# Allegro board 2019-08-16-ss.brd
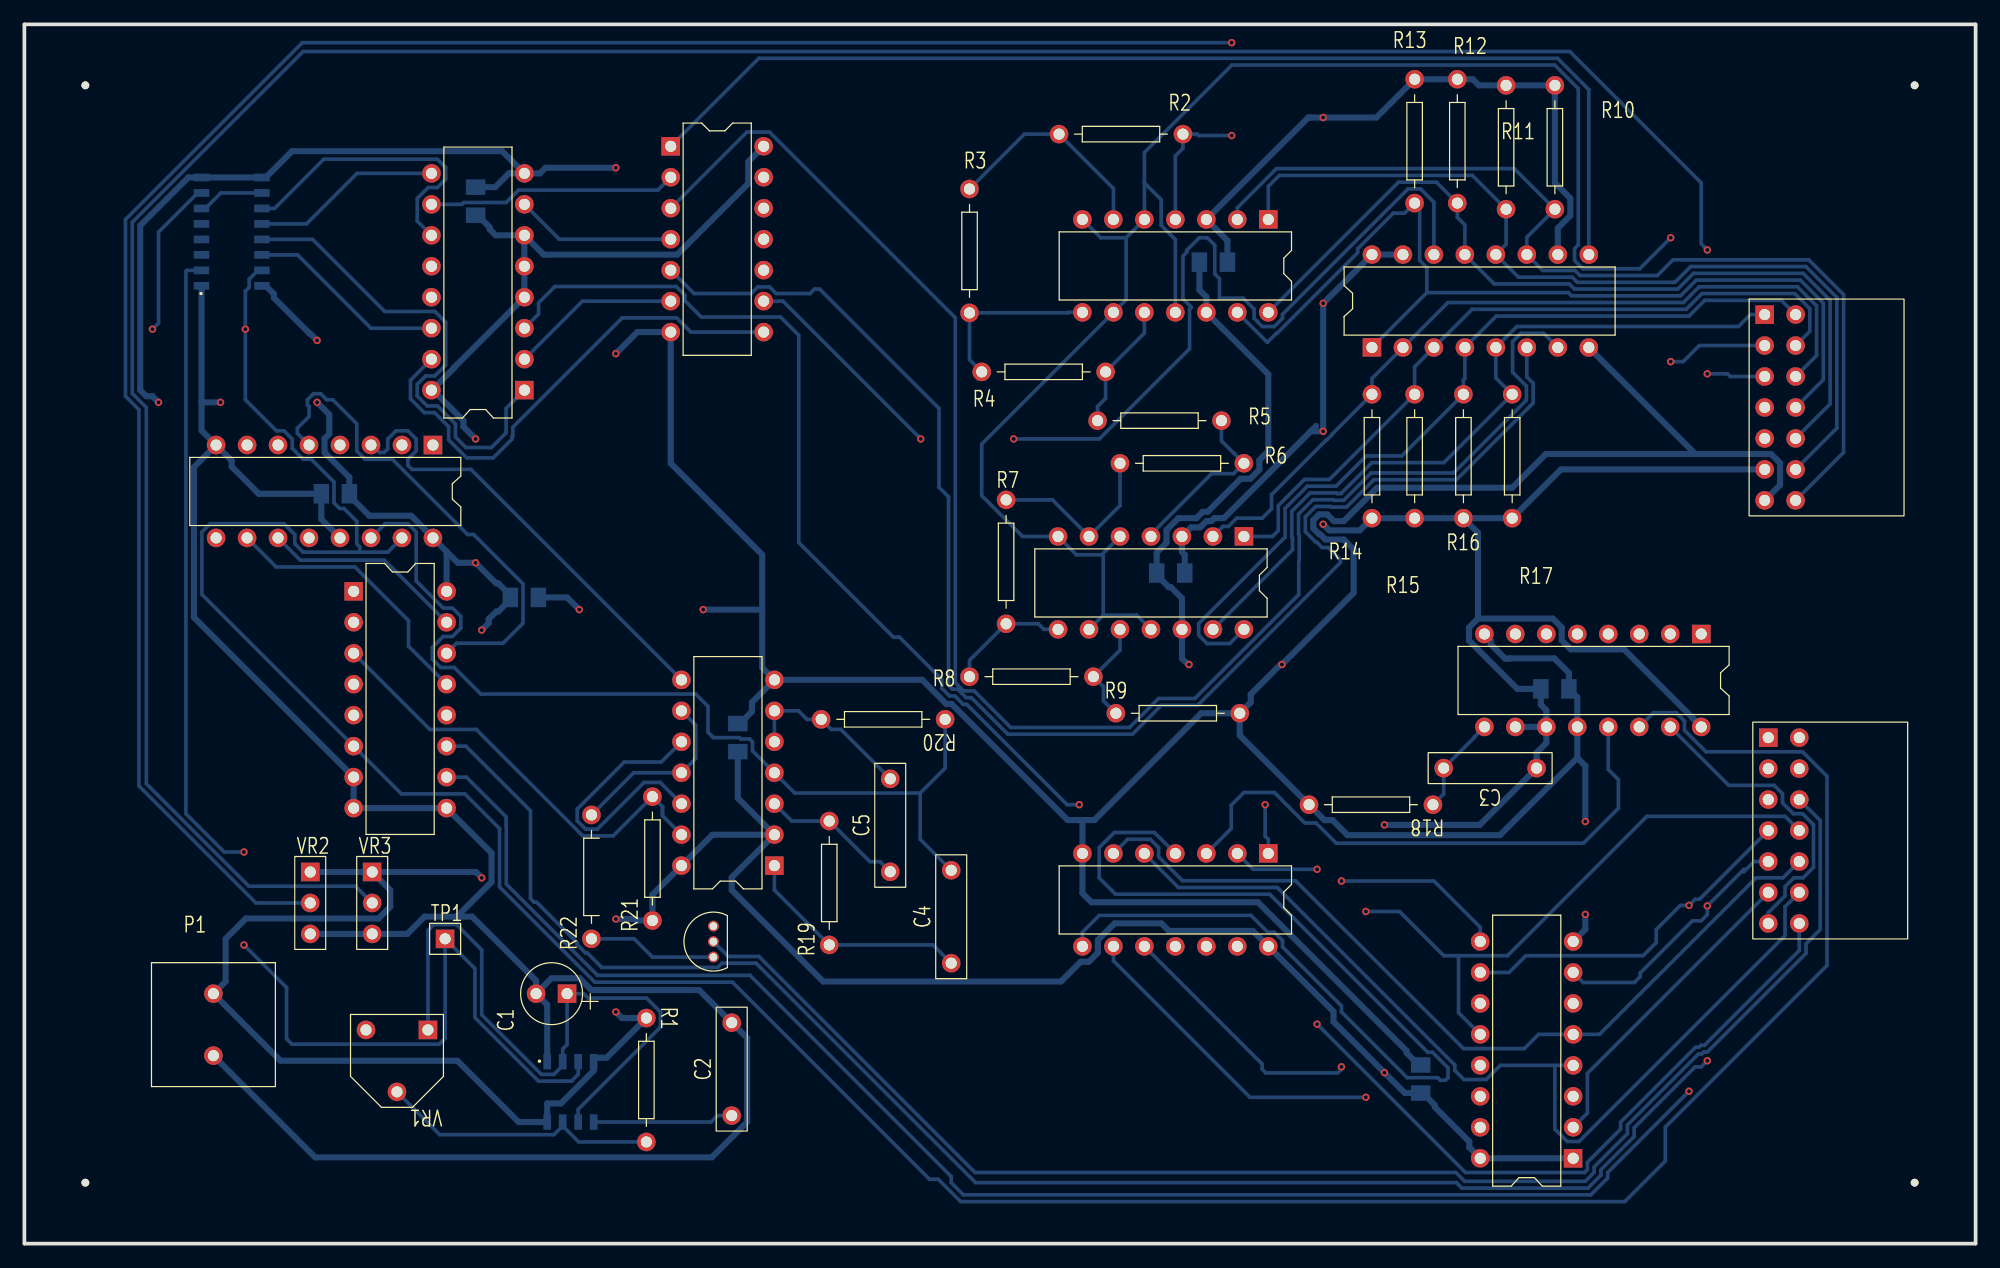
[diagram p0: board, top side]
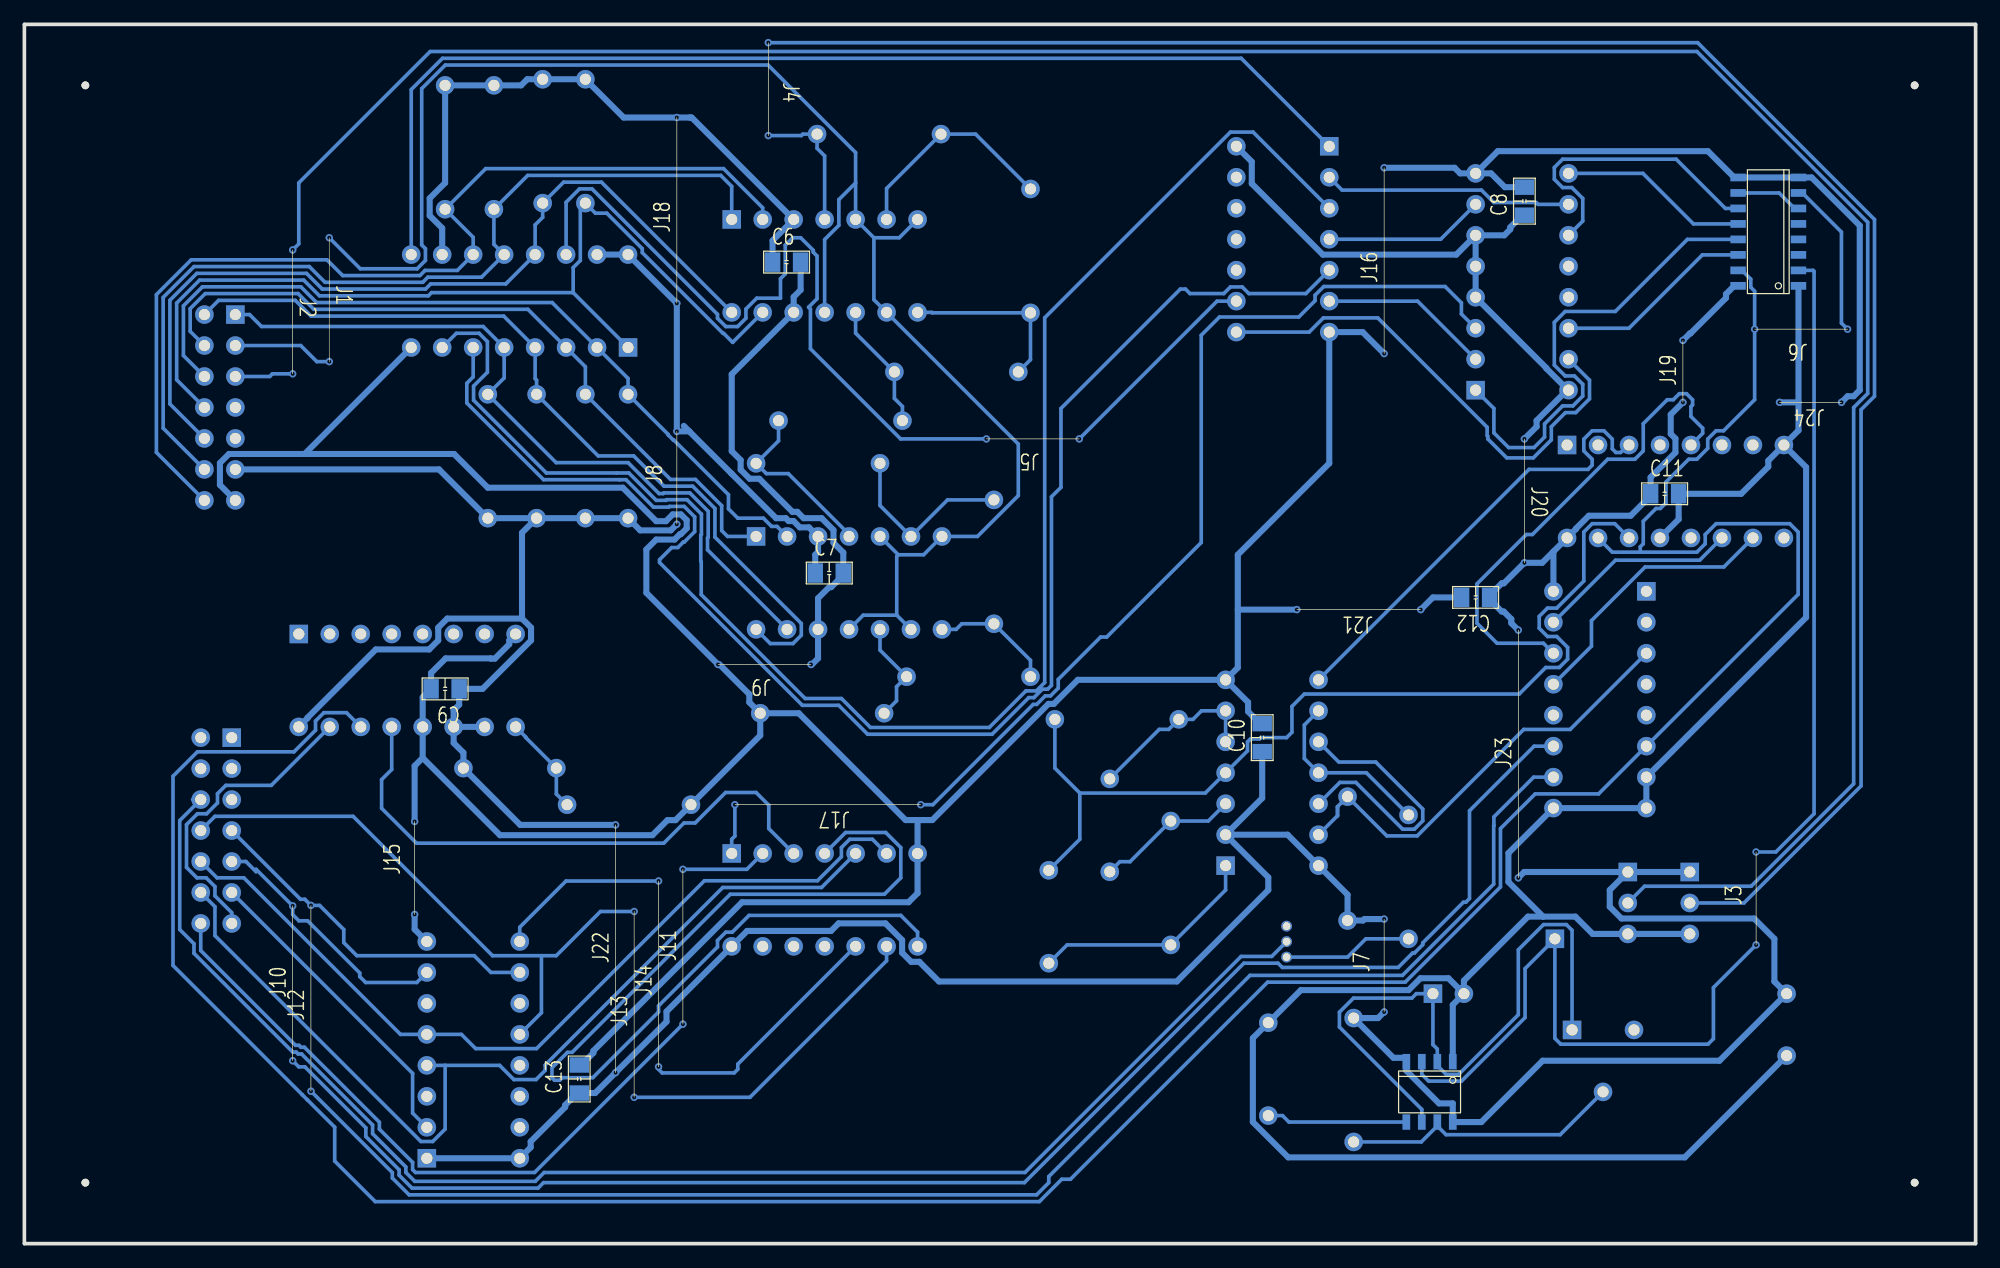
[diagram p1: board, bottom side, seen from below]

Outline 160 x 100 mm; copper layers: TOP, BOTTOM. Coordinates in mm from the lower left corner of the outline.
Outline path: 0,100 0,0 160,0 160,100 0,100

## Design rules (mm)
nets with their own width: min track width 0.5; nets +5V GND

## Placement (name value [footprint] x y rotation side)
C1  10uF  [CAP196]  44.5 20.5 90 top
C2  0.1uF  [CAP300]  58 10.5 90 top
C3  0.1uF  [CAP300]  124 39 180 top
C4  0.1uF  [CAP300]  76 23 90 top
C5  0.1uF  [CAP300]  71 30.5 90 top
C6  0.1uF  [SMDCAP]  98.5 80.5 180 bottom
C7  0.1uF  [SMDCAP]  95 55 180 bottom
C8  0.1uF  [SMDCAP]  37 84.5 90 bottom
C9  0.1uF  [SMDCAP]  124.5 45.5 0 bottom
C10  0.1uF  [SMDCAP]  58.5 40.5 90 bottom
C11  0.1uF  [SMDCAP]  26.5 61.5 180 bottom
C12  0.1uF  [SMDCAP]  40 53 0 bottom
C13  0.1uF  [SMDCAP]  114.5 12.5 90 bottom
J1  -  [J3]  135 82.5 270 bottom
J2  -  [J3]  138 81.5 270 bottom
J3  -  [J2]  18 24.5 90 bottom
J4  -  [J2]  99 98.5 270 bottom
J5  -  [J2]  73.5 66 0 bottom
J6  -  [J2]  10.5 75 0 bottom
J7  -  [J2]  48.5 19 90 bottom
J8  -  [J2]  106.5 59 90 bottom
J9  -  [J2]  95.5 47.5 0 bottom
J10  -  [J4]  138 15 90 bottom
J11  -  [J4]  106 18 90 bottom
J12  -  [J5]  136.5 12.5 90 bottom
J13  -  [J5]  110 12 90 bottom
J14  -  [J5]  108 14.5 90 bottom
J15  -  [J2]  128 27 90 bottom
J16  -  [J5]  48.5 73 90 bottom
J17  -  [J5]  86.5 36 0 bottom
J18  -  [J5]  106.5 77.12 90 bottom
J19  -  [J1]  24 69 90 bottom
J20  -  [J3]  37 66 270 bottom
J21  -  [J3]  45.5 52 0 bottom
J22  -  [J8]  111.52 14.02 90 bottom
J23  -  [J8]  37.5 30 90 bottom
J24  -  [J1]  11 69 0 bottom
NOREF  -  [unnamed]  155 5 0 top
NOREF#2  -  [unnamed]  5 95 0 top
NOREF#3  -  [unnamed]  155 95 0 top
NOREF#4  -  [unnamed]  5 5 0 top
P1  CON2  [2P]  15.5 20.5 0 top
P2  CON14  [JUMPER14]  142.7 76.2 270 top
P3  CON14  [JUMPER14]  143 41.5 270 top
Q1  2SC1815  [TO92]  56.5 23.5 180 top
R1  10K  [RES400]  51 18.5 270 top
R2  10K  [RES400]  95 91 180 top
R3  10K  [RES400]  77.5 86.5 270 top
R4  10K  [RES400]  78.5 71.5 0 top
R5  10K  [RES400]  88 67.5 0 top
R6  10K  [RES400]  100 64 180 top
R7  10K  [RES400]  80.5 61 270 top
R8  10K  [RES400]  77.5 46.5 0 top
R9  10K  [RES400]  89.5 43.5 0 top
R10  10K  [RES400]  125.5 95 270 top
R11  10K  [RES400]  121.5 95 270 top
R12  10K  [RES400]  117.5 95.5 270 top
R13  10K  [RES400]  114 95.5 270 top
R14  10K  [RES400]  110.5 59.5 90 top
R15  10K  [RES400]  114 59.5 90 top
R16  10K  [RES400]  118 59.5 90 top
R17  10K  [RES400]  122 59.5 90 top
R18  10K  [RES400]  115.5 36 180 top
R19  10K  [RES400]  66 24.5 90 top
R20  10K  [RES400]  75.5 43 180 top
R21  10K  [RES400]  51.5 26.5 90 top
R22  10K  [RES400]  46.5 25 90 top
TP1  TP  [JUMPER1]  34.5 25 0 top
U1  NE555  [SOIC8]  44.78 12.45 270 bottom
U2  LM339  [DIP14_3]  102 84 270 top
U3  LM339  [DIP14_3]  100 58 270 top
U4  40147  [DIP16_3]  110.5 73.5 90 top
U5  4069  [DIP14_3]  53 90 0 top
U6  4518  [SOIC16]  17 83 0 bottom
U7  4585  [DIP16_3]  41 70 180 top
U8  4027  [DIP16_3]  137.5 50 270 top
U9  4071  [DIP14_3]  102 32 270 top
U10  4001  [DIP14_3]  61.5 31 180 top
U11  4017  [DIP16_3]  33.5 65.5 270 top
U12  4051  [DIP16_3]  27 53.5 0 top
U13  4175  [DIP16_3]  127 7 180 top
VR1  1M  [VR1]  33.09 17.53 180 top
VR2  10K  [VR2]  23.44 27.94 0 top
VR3  10K  [VR2]  28.52 27.94 0 top

## Library data of the parts
C1 = Cap POL
C2-C5 = Cap NP
C6-C13 = Cap TEXT
J1-J24 = JUMPER
P1 = CON2
P2 P3 = CON14
Q1 = 2SC1815
R1-R22 = resistor
TP1 = TP
U1 = NE555: Tolerance: ***; User Part Number: ***
U2 U3 = LM339: Tolerance: ***; User Part Number: ***
U4 = 40147: Tolerance: ***; User Part Number: ***
U5 = 4069: Tolerance: ***; User Part Number: ***
U6 = 4518: Tolerance: ***; User Part Number: ***
U7 = 4585: Tolerance: ***; User Part Number: ***
U8 = 4027: Tolerance: ***; User Part Number: ***
U9 = 4071: Tolerance: ***; User Part Number: ***
U10 = 4001: Tolerance: ***; User Part Number: ***
U11 = 4017: Tolerance: ***; User Part Number: ***
U12 = 4051: Tolerance: ***; User Part Number: ***
U13 = 4175: Tolerance: ***; User Part Number: ***
VR1 = VR1
VR2 VR3 = VR2_0

## Footprints (pads in the part's own frame, mm; a bottom-side part is the same pattern mirrored in y, then rotated)
2P
  round 1.524 hole 0.914: 1(0,0) 2(0,-5.08)
CAP196
  rect 1.524x1.524 hole 0.914: 1(0,0)
  round 1.524 hole 0.914: 2(0,2.54)
CAP300
  round 1.524 hole 0.914: 1(0,0) 2(7.62,0)
DIP14_3
  rect 1.524x1.524 hole 0.914: 1(0,0)
  round 1.524 hole 0.914: 2(0,-2.54) 3(0,-5.08) 4(0,-7.62) 5(0,-10.16) 6(0,-12.7) 7(0,-15.24) 8(7.62,-15.24) 9(7.62,-12.7) 10(7.62,-10.16) 11(7.62,-7.62) 12(7.62,-5.08) 13(7.62,-2.54) 14(7.62,0)
DIP16_3
  rect 1.524x1.524 hole 0.914: 1(0,0)
  round 1.524 hole 0.914: 2(0,-2.54) 3(0,-5.08) 4(0,-7.62) 5(0,-10.16) 6(0,-12.7) 7(0,-15.24) 8(0,-17.78) 9(7.62,-17.78) 10(7.62,-15.24) 11(7.62,-12.7) 12(7.62,-10.16) 13(7.62,-7.62) 14(7.62,-5.08) 15(7.62,-2.54) 16(7.62,0)
JUMPER1
  rect 1.524x1.524 hole 0.914: 1(0,0)
JUMPER14
  rect 1.524x1.524 hole 0.914: 1(0,0)
  round 1.524 hole 0.914: 2(0,2.54) 3(2.54,0) 4(2.54,2.54) 5(5.08,0) 6(5.08,2.54) 7(7.62,0) 8(7.62,2.54) 9(10.16,0) 10(10.16,2.54) 11(12.7,0) 12(12.7,2.54) 13(15.24,0) 14(15.24,2.54)
RES400
  round 1.524 hole 0.914: 1(0,0) 2(10.16,0)
SMDCAP
  rect 1.27x1.6 smd: 1(-0.15,0) 2(2.15,0)
SOIC8
  rect 1.27x0.635 smd: 1(-2.476,1.905) 2(-2.476,0.635) 3(-2.476,-0.635) 4(-2.476,-1.905) 5(2.476,-1.905) 6(2.476,-0.635) 7(2.476,0.635) 8(2.476,1.905)
SOIC16
  rect 1.27x0.635 smd: 1(-2.476,4.445) 2(-2.476,3.175) 3(-2.476,1.905) 4(-2.476,0.635) 5(-2.476,-0.635) 6(-2.476,-1.905) 7(-2.476,-3.175) 8(-2.476,-4.445) 9(2.476,-4.445) 10(2.476,-3.175) 11(2.476,-1.905) 12(2.476,-0.635) 13(2.476,0.635) 14(2.476,1.905) 15(2.476,3.175) 16(2.476,4.445)
TO92
  round 0.889 hole 0.635: 1(0,0) 2(0,-1.27) 3(0,-2.54)
unnamed
  round 0.635 hole 3.175 unplated: (0,0)
VR1
  rect 1.524x1.524 hole 0.914: 1(0,0)
  round 1.524 hole 0.914: 2(2.54,5.08) 3(5.08,0)
VR2
  rect 1.524x1.524 hole 0.914: 1(0,2.54)
  round 1.524 hole 0.914: 2(0,0) 3(0,-2.54)

## Nets
+5V: C3.1 C6.1 C7.1 C8.1 C9.1 C10.1 C11.1 C12.1 C13.1 P1.1 P2.11 R1.1 R10.1 R11.1 R12.1 R13.1 R14.1 R15.1 R16.1 R17.1 R21.1 U1.4(RST) U1.8(VCC) U2.3 U3.3 U4.10(I\9\) U4.15(I\0\) U4.16(VCC) U5.14 U6.16 U7.4(A>BIN) U7.5(A<BIN) U7.6(A=BIN) U7.16(VCC) U8.10(J) U8.11(K) U8.16 U9.14 U10.2(I1) U10.14 U11.16(VCC) U12.16(VCC) U13.1(R\S\T\) U13.16(VCC) VR2.1(A) VR3.1(A)
GND: C1.2 C2.2 C6.2 C7.2 C8.2 C9.2 C10.2 C11.2 C12.2 C13.2 P1.2 P2.13 R9.2 R18.2 U1.1(GND) U2.12 U3.12 U4.8(GND) U5.7 U6.1(CLK) U6.8 U6.9(CLK) U7.8(GND) U8.8 U8.12(RST) U9.7 U10.7 U11.8(GND) U11.13(C\K\E\N\) U12.7(VEE) U12.8(GND) U12.9(C) U13.8(GND) VR2.3(WIPER) VR3.3(WIPER)
ADC0: P2.14 R10.2 U2.2(OUT) U4.11(I\1\)
ADC1: P2.12 R11.2 U2.1(OUT) U4.12(I\2\)
ADC2: P2.10 R12.2 U2.14(OUT) U4.13(I\3\)
ADC3: P2.8 R13.2 U2.13(OUT) U4.1(I\4\)
ADC4: P2.6 R14.2 U3.2(OUT) U4.2(I\5\)
ADC5: P2.4 R15.2 U3.1(OUT) U4.3(I\6\)
ADC6: P2.2 R16.2 U3.14(OUT) U4.4(I\7\)
ADC7: P2.1 R17.2 U3.13(OUT) U4.5(I\8\)
CLK: TP1.1 U1.3(OUT) U6.2(EN)
MOTOR-GND: P3.6 Q1.2(C)
MR: U6.7(CLR) U6.15(CLR) U8.14(Q\) U11.15(RST) U12.6(E\N\)
MR2: P3.13 U8.15(Q)
SW1: P3.14 U9.2(I1)
SW2: P3.12 U9.5(I0) U13.4(D0)
SW3: P3.10 U9.6(I1) U13.5(D1)
SW4: P3.8 U9.9(I1) U13.12(D2)
SWLED1: P3.11 U13.2(Q0)
SWLED2: P3.9 U12.11(A) U13.7(Q1)
SWLED3: P3.7 U12.10(B) U13.10(Q2)
VR3: P2.5 VR3.2(B)
VR-LED: P2.3 U2.5(+IN) U2.7(+IN) U2.9(+IN) U2.11(+IN) U3.5(+IN) U3.7(+IN) U3.9(+IN) U3.11(+IN)
N01821: R1.2 U1.7(DISC) VR1.2
N01825: C1.1 U1.2(TRIG) U1.6(THR) VR1.1
N01879: R2.2 R3.1 U2.6(-IN)
N01886: R2.1 U2.4(-IN) VR2.2(B)
N01929: R3.2 R4.1 U2.8(-IN)
N02004: R4.2 R5.1 U2.10(-IN)
N02079: R5.2 R6.1 U3.4(-IN)
N02154: R6.2 R7.1 U3.6(-IN)
N02229: R7.2 R8.1 U3.8(-IN)
N02304: R8.2 R9.1 U3.10(-IN)
N05133: U4.9(A\) U5.1(I)
N05160: U4.7(B\) U5.3(I)
N05172: U4.6(C\) U5.5(I)
N05184: U4.14(D\) U5.9(I)
N05202: U5.2(O) U7.10(A0)
N05214: U5.4(O) U7.7(A1)
N05226: U5.6(O) U7.2(A2)
N05238: U5.8(O) U7.15(A3)
N05506: U6.6(Q3) U6.10(EN)
N05615: U6.11(Q0) U7.11(B0)
N05627: U6.12(Q1) U7.9(B1)
N05639: U6.13(Q2) U7.1(B2)
N05651: U6.14(Q3) U7.14(B3)
N05837: C2.1 U1.5(CV)
N06039: U7.3(A=BOUT) U9.1(I0)
N06118: U8.13(CLK) U9.3(O)
N06347: C3.2 R18.1 U8.9(SET)
N12761: Q1.1(E) R22.1
N12765: Q1.3(B)
N12791: R22.2 U10.9(I1) U10.11(O)
N12870: U10.10(O) U10.12(I0)
N12949: R21.2 U10.13(I1) U12.3(X)
N13065: U9.4(O) U9.8(I0)
N13106: U9.10(O) U13.9(CLK)
N16220: U10.8(I0) U11.3(0)
N16266: U11.10(4) U12.13(X0)
N16278: U11.5(6) U12.14(X1)
N16290: U11.11(9) U12.15(X2)
N16648: C5.1 R19.2 U10.3(O)
N16662: C5.2 R20.2 U10.5(I0) U10.6(I1)
N16697: C4.1 R19.1 U10.1(I0)
N16721: C4.2 R20.1 U10.4(O) U11.14(CLK)

Pads without a net: P2 7 9; P3 1 2 3 4 5; U5 10 11 12 13; U6 3 4 5; U7 12 13; U8 1 2 3 4 5 6 7; U9 11 12 13; U11 1 2 4 6 7 9 12; U12 1 2 4 5 12; U13 3 6 11 13 14 15; VR1 3

## Via types
v1: diameter 0.61, hole 0.33, TOP to BOTTOM, 48 vias

## Routing (per net, layer and track width the routed paths; a pad name or vN(x,y) marks a point on that pad's centre or on a via; arc(x,y) is an arc through that point)
+5V: length 483.9
  BOTTOM w0.5: 34.62,56.76 U11.16 32.78,58.6 32.78,58.63 31.71,59.7 28.29,59.7 26.65,61.34 C11.1 26.65,62.85 25.44,64.06 24.61,64.89 24.61,66.03 25,66.41 25,68 v1(24,69) ; 34.62,56.76 U12.16 ; 34.62,56.76 35.54,55.84 v1(37,55.84) 38.68,54.16 38.86,54.16 39.85,53.16 C12.1 39.85,52.84 38.86,51.84 38.69,51.84 38.07,51.22 38.07,50.89 v1(37.5,50.32) ; U7.6 42.59,81.11 53.52,81.11 59.35,86.94 59.35,88.73 U5.14 ; U7.6 38.65,82.7 38.16,83.19 38.16,83.36 37.16,84.35 C8.1 ; U7.6 U7.5 U7.4 35.2,71.82 35.2,71.79 33.41,70 ; U4.15 U4.16 v1(106.5,77.12) v1(106.5,66.62) 105.48,66.62 ; VR2.1 VR3.1 ; VR3.1 30,29 30,27.63 29.04,26.67 18.16,26.67 16.5,25 16.5,21.5 P1.1 21,15 35.5,15 40.53,9.97 U1.8 42.87,11.5 44,11.5 46.68,14.18 46.68,15.24 47.74,15.24 R1.1 49,18.5 v1(48.5,19) ; VR3.1 37.02,30.48 v1(37.5,30) ; U8.10 U8.11 ; U8.11 124.8,41.07 124,40.27 C3.1 119.34,34.34 v1(111.52,34.34) ; U8.11 124.8,43.75 124.35,44.2 C9.1 122.43,45.5 118.45,49.48 118.45,50.52 119.19,51.27 ; R16.1 R15.1 R14.1 109.5,58.5 107,58.5 v1(106.5,59) ; R16.1 R17.1 126,63.5 P2.11 ; R16.1 119.19,58.3 119.19,51.27 ; v1(24,74.08) 23.43,74.65 23.38,74.65 20.47,77.56 20.47,77.88 19.79,78.56 U6.16 ; 119.19,51.27 125.33,51.27 126.07,50.52 126.07,49.48 126.81,48.73 131.18,48.73 136.78,43.13 136.78,43.1 U8.16 ; 33.41,70 33.5,70 36,67.5 36,67 v1(37,66) ; 33.41,70 U7.16 ; C7.1 95.15,56.5 94.92,56.73 U3.3 95.67,58.75 96.42,58.75 96.94,59.27 97.33,59.27 97.57,59.5 98.36,59.5 102.02,63.16 102.02,63.16 105.48,66.62 ; U4.10 125.74,83.29 126.77,84.31 126.77,85.73 125.5,87 R10.1 R11.1 119.27,95 118.77,95.5 R12.1 R13.1 110.86,92.36 v1(106.5,92.36) 105.43,92.36 105.43,92.36 105.28,92.36 U2.3 98.65,82.27 C6.1 ; U13.1 U13.16 118.48,7.9 118.48,8.37 115.66,11.19 115.66,11.36 114.67,12.35 C13.1 113.2,12.35 v1(111.52,14.02) 107.35,18.2 107.35,19.03 U9.14 100.73,25.65 93.85,25.65 93.23,26.27 89.39,26.27 88.03,24.9 88.03,23.86 87.28,23.11 86.61,23.11 85,21.5 65.5,21.5 58,29 58,30.04 U10.2 ; U10.2 58.5,36.54 C10.1 ; U10.2 56.42,33.54 U10.14 51.5,28.62 R21.1 50.23,26.5 50.11,26.62 v1(48.5,26.62) ; 105.48,66.62 105.93,67.07
GND: length 568.6
  BOTTOM w0.5: U8.8 120.24,49.48 120.24,49.16 121.42,47.98 121.74,47.98 121.76,48 125.45,48 126.65,46.8 C9.2 127.34,44.81 U8.12 127.34,39.84 ; U7.8 42.27,87.78 42.73,88.24 v1(48.5,88.24) ; U7.8 39.18,89.6 21.95,89.6 19.79,87.44 U6.9 U6.8 13.45,87.44 9.5,83.5 9.5,70 10,69.5 10.5,69.5 v1(11,69) ; U7.8 39.73,87.78 38.6,86.65 C8.2 ; v1(95.5,47.5) 95.42,47.5 94.92,48 U3.12 94.92,52.93 94.01,53.84 93.84,53.84 92.85,54.84 C7.2 92.85,56.68 93.65,57.48 93.65,58.52 94.63,59.5 96.1,59.5 96.62,60.02 97.02,60.02 99.73,62.73 100.53,62.73 101.27,63.48 101.27,64.27 102,65 102,71.3 U2.12 96.92,77.65 96.35,78.22 C6.2 ; v1(48.5,73) 50.26,74.76 U5.7 53,64 60.5,56.5 60.5,52 ; 60.5,52 60.5,47.24 U10.7 ; 60.5,52 v1(55.66,52) ; C12.2 44.5,53 v1(45.5,52) ; C1.2 42.87,19.59 U1.1 ; C1.2 43.23,21.77 45.52,21.77 46.5,20.79 55.33,20.79 C2.2 59.27,16.85 59.27,9.97 56.37,7.07 23.85,7.07 P1.2 ; C1.2 41.96,21.57 36.71,26.82 35.47,26.82 ; 86.76,34.74 U9.7 86.76,28.74 87.5,28 101.15,28 113.34,15.81 113.34,15.64 114.33,14.65 C13.2 ; 86.76,34.74 87.74,34.74 96.5,43.5 R9.2 ; 86.76,34.74 85.55,34.74 76.03,44.27 75.59,44.27 73.62,46.24 U10.7 ; 14.52,69 U6.1 ; 14.52,69 14.52,66.7 U11.8 ; 14.52,69 v1(16.08,69) ; R9.2 100.56,44.4 100.56,45.06 103,47.5 v1(103.12,47.5) 109,53.38 109,56.93 108.19,57.75 106.69,57.75 106.24,58.19 106.16,58.19 105.69,58.66 105.69,59.34 106.16,59.81 106.84,59.81 107.39,59.25 108.19,59.25 110.93,62 122,62 124.77,64.77 137.01,64.77 ; R9.2 99.66,41.68 R18.2 106.61,34.73 107.27,34.73 108.5,33.5 121,33.5 127.34,39.84 ; 35.47,26.82 32.82,26.82 31.4,25.4 VR3.3 VR2.3 ; 35.47,26.82 38.31,29.66 38.31,32.03 U12.9 U12.8 U12.7 13.9,51.36 13.9,63.68 U11.8 ; P2.13 143.97,62.23 143.97,64.03 143.22,64.77 137.01,64.77 ; v1(128,27) 128,25.78 U13.8 ; 137.01,64.77 U4.8 ; U10.7 59.66,44.4 59.66,43.64 58.66,42.65 C10.2 ; U11.8 17,64.22 17,63.72 19.22,61.5 C11.2 24.35,59.41 U11.13 ; 127.34,39.84 128,39.18 v1(128,34.62)
ADC0: length 81.3
  BOTTOM w0.3: U2.2 99.46,84.96 102.67,88.17 122.17,88.17 R10.2 123.2,82.54 U4.11 124.5,79.82 127.14,79.82 127.57,79.4 133.9,79.4 135.19,80.69 146.32,80.69 149.18,77.83 149.18,64.9 P2.14
ADC1: length 73.8
  BOTTOM w0.3: U2.1 102,86.72 102.9,87.61 118.73,87.61 R11.2 121.5,81.96 U4.12 122.51,79.27 126.92,79.27 127.34,78.85 135.35,78.85 136.64,80.14 146.09,80.14 148.62,77.6 148.62,66.88 P2.12
ADC2: length 70.2
  BOTTOM w0.3: P2.10 148.07,68.87 148.07,77.37 145.86,79.58 136.87,79.58 135.58,78.29 127.11,78.29 126.69,78.71 120.53,78.71 120.39,78.85 U4.13 118.12,83.55 117.5,84.17 R12.2 115.78,87.06 112.68,87.06 U2.14
ADC3: length 78
  BOTTOM w0.3: P2.8 147.51,70.85 147.51,77.14 145.63,79.03 137.1,79.03 135.81,77.74 126.88,77.74 126.61,78 115,78 ; 115,78 U4.1 ; 115,78 115,80.05 114.41,80.64 114.41,84.93 R13.2 113.17,84.52 112.25,84.52 109.33,81.6 109.33,81.28 102.71,74.66 102.66,74.66 101.92,73.92 U2.13
ADC4: length 66.6
  BOTTOM w0.3: P2.6 146.96,72.84 146.96,76.91 145.4,78.47 137.33,78.47 136.04,77.18 116.72,77.18 U4.2 110.5,70.96 R14.2 107.21,66.37 107.21,66.33 106.79,65.91 106.75,65.91 102.27,61.43 102.27,60.27 101.5,59.5 99.4,59.5 98.73,58.83 98.28,58.83 U3.2
ADC5: length 61.2
  BOTTOM w0.3: U3.1 102.34,58 102.82,58.48 102.82,60.53 104.97,62.68 107.02,62.68 R15.2 114,71.92 U4.3 118.71,76.63 136.27,76.63 137.56,77.92 145.17,77.92 146.41,76.68 146.41,74.83 P2.4
ADC6: length 69.4
  BOTTOM w0.3: U3.14 98.83,49.21 96.98,49.21 96.29,49.9 96.29,50.86 103.38,57.94 103.38,60.3 105.2,62.12 107.56,62.12 110.04,64.61 112.95,64.61 R16.2 118,70.83 118.12,70.95 U4.4 120.7,76.08 136.5,76.08 137.79,77.37 144.07,77.37 P2.2
ADC7: length 62.1
  BOTTOM w0.3: U3.13 103.98,56.9 103.98,57.88 103.93,57.93 103.93,60.07 105.43,61.57 107.57,61.57 107.62,61.52 107.96,61.52 110.49,64.05 116.39,64.05 R17.2 120.66,71 U4.5 122.38,75.22 140.55,75.22 141.53,76.2 P2.1
CLK: length 101.9
  BOTTOM w0.3: v1(18,32.12) 16.38,32.12 13.25,35.25 13.25,79.75 13.32,79.83 U6.2 ; v1(18,24.5) 21.5,21 21.5,16.8 21.94,16.36 34.02,16.36 34.5,16.84 TP1.1 36.95,22.55 36.95,18.54 42.16,13.33 44.86,13.33 45.41,13.88 U1.3
MOTOR-GND: length 120.6
  BOTTOM w0.3: 146.21,36.42 P3.6 147.26,34.7 147.26,25.76 146.09,24.59 146.09,23.81 137.99,15.71 137.71,15.71 137.55,15.55 137.27,15.55 131.45,9.73 131.45,9.01 128.72,6.29 128.72,5.84 127.99,5.11 118.11,5.11 117.38,5.83 77.95,5.83 60.23,23.55 57.72,23.55 Q1.2
MR: length 265.8
  BOTTOM w0.3: 27.5,56.71 29.79,56.71 U11.15 ; 27.5,56.71 27.5,57.15 27.25,57.4 27.25,59.25 26.2,60.3 25.85,60.3 25.39,60.75 25.39,62.47 23.52,64.33 22.86,64.33 21.97,65.22 21.97,65.98 21.28,66.67 20.67,66.67 18.12,69.21 v1(18.12,75) 18.12,78.12 18.44,78.44 18.44,79.1 19.16,79.83 U6.15 ; 27.5,56.71 22.86,56.71 22.17,57.4 22.17,58.16 21.28,59.05 15.24,59.05 14.55,58.36 14.55,53.25 U12.6 30.91,36.89 36.11,36.89 38.96,34.04 38.96,29.25 46.77,21.45 58.05,21.45 74.22,5.28 74.94,5.28 76.77,3.44 131.23,3.44 134.56,6.77 134.56,9.55 136.79,11.79 136.79,11.79 137.21,12.21 137.21,12.21 147.81,22.81 147.81,38.34 145.81,40.33 137.9,40.33 136.13,42.1 136.13,42.86 135.44,43.55 133.59,43.55 U8.14 ; U6.7 14.21,86.17 11,82.97 11,75.5 v1(10.5,75)
MR2: length 25.6
  BOTTOM w0.3: U8.15 139.75,37.59 143.48,37.59 144.17,36.9 144.17,36.15 145.06,35.25 145.81,35.25 146.71,34.36 146.71,30.86 145.85,30 145.09,30 144.37,29.28 144.37,28.52 143,27.15 P3.13
SW1: length 62.1
  BOTTOM w0.3: v1(106,30.7) 100.76,30.7 U9.2 ; P3.14 145.54,24.04 137.76,16.26 137.48,16.26 137.32,16.11 137.04,16.11 130.89,9.96 130.89,9.39 128.17,6.67 128.17,6.07 127.93,5.83 118.17,5.83 v1(106,18)
SW2: length 79.1
  BOTTOM w0.3: 125.5,14.62 125.5,9.39 126.52,8.37 127.48,8.37 144.37,25.27 144.37,27.63 P3.12 ; 125.5,14.62 121.03,14.62 119.86,13.45 118.05,13.45 117.29,14.21 117.29,14.65 102.73,29.21 94.63,29.21 U9.5 ; 125.5,14.62 U13.4
SW3: length 70.6
  BOTTOM w0.3: P3.10 144.2,30 142,30 129.16,17.16 U13.5 124.16,17.16 122.99,15.99 118.01,15.99 104.24,29.76 94.97,29.76 93.01,31.73 93.01,32.48 92.32,33.17 90.47,33.17 U9.6
SW4: length 76
  BOTTOM w0.3: 117.6,23.61 117.6,18.94 U13.12 ; 117.6,23.61 121.61,23.61 133.04,35.05 144.37,35.05 P3.8 ; 117.6,23.61 116.39,23.61 112.76,27.24 v1(110,27.24) ; v1(110,12) 100.5,12 89.3,23.2 U9.9
SWLED1: length 25.9
  BOTTOM w0.3: P3.11 128.17,13.97 128.17,10.71 U13.2
SWLED2: length 149.3
  BOTTOM w0.3: v1(138,15) 137.5,14.5 137,14.5 132,9.5 132,8.78 129.27,6.06 129.27,5.61 128.22,4.55 117.88,4.55 117.43,5 78,5 60,23 57.2,23 56.85,22.65 47.35,22.65 46.17,23.83 46.02,23.83 45.33,24.52 45.33,24.67 42,28 41.8,28 41.5,28.3 41.5,35.5 36.2,40.8 U12.11 ; P3.9 141.83,31.34 141,30.51 141,30.7 v1(138,27.7) 138,26.99 137.49,26.48 136.78,26.48 132.5,22.2 132.5,21.9 132.01,21.41 127.83,21.41 U13.7
SWLED3: length 152.4
  BOTTOM w0.3: U13.10 121.74,22.24 123.11,23.61 132.73,23.61 133.81,24.69 133.81,25.76 135.79,27.74 v1(136.5,27.74) 137,28.24 137.36,28.24 P3.7 ; U12.10 36.24,38.26 39.5,35 39.5,34.28 39.52,34.27 39.52,29.48 47,22 59.5,22 76,5.5 76,5 77,4 128.45,4 129.83,5.38 129.83,5.83 v1(136.5,12.5)
VR3: length 218.5
  BOTTOM w0.3: VR3.2 27.15,29.31 18.4,29.31 10,37.72 10,68.58 8.85,69.73 8.85,83.77 22.85,97.77 126.73,97.77 137.5,87 137.5,82 v1(138,81.5) ; v1(138,71.34) 139.66,71.34 139.88,71.12 P2.5
VR-LED: length 145.6
  BOTTOM w0.3: U2.7 88.26,82.5 90.34,82.5 ; U3.9 88.47,51.55 ; 88.47,51.55 88.47,56.37 88.34,56.5 ; 88.47,51.55 91.21,51.55 U3.11 ; 90.34,82.5 90.34,77.42 U2.9 78.5,65.58 78.5,61.35 81.85,58 U3.7 86.26,56.5 88.34,56.5 ; 90.34,82.5 U2.5 91.84,87 ; 91.84,87 93.21,85.63 93.21,83.52 94.38,82.35 U2.11 ; 91.84,87 91.84,89.49 99.02,96.67 125.48,96.67 127.42,94.73 127.42,81.91 127.11,81.6 127.11,80.64 127.8,79.95 132.45,79.95 v1(135,82.5) ; 88.34,56.5 U3.5 ; P2.3 137.34,73.66 136.02,72.34 v1(135,72.34)
N01821: length 23.1
  BOTTOM w0.3: VR1.2 34.07,8.93 43.42,8.93 44.14,9.65 ; 44.14,9.65 45.45,8.34 R1.2 ; 44.14,9.65 44.14,9.97
N01825: length 54.1
  BOTTOM w0.3: U1.6 45.41,11.01 52.17,17.76 52.17,18.98 51.01,20.14 46.23,20.14 45.87,20.5 C1.1 44.5,16.32 44.14,15.96 44.14,14.61 43.42,13.88 42.39,13.88 37.5,18.77 37.5,24.1 35.43,26.17 33.56,26.17 33.09,25.7 VR1.1
N01879: length 18.1
  BOTTOM w0.3: R3.1 82,91 R2.2 89.3,86.54 U2.6
N01886: length 173
  BOTTOM w0.3: VR2.2 18.99,27.94 9.39,37.54 9.39,68.4 8.29,69.5 8.29,84 22.79,98.5 v1(99,98.5) ; U2.4 94.38,89.21 95,89.83 R2.1 96.17,91 96.29,90.88 v1(99,90.88)
N01929: length 14.5
  BOTTOM w0.3: R4.1 77.5,72.5 R3.2 85.55,76.34 85.59,76.38 U2.8
N02004: length 10.5
  BOTTOM w0.3: U2.10 91.84,74.68 R4.2 88.66,69.33 88,68.67 R5.1
N02079: length 14.5
  BOTTOM w0.3: U3.4 92.38,58.18 97.36,63.15 99.15,63.15 R6.1 98.16,65.84 R5.2
N02154: length 15.1
  BOTTOM w0.3: R6.2 89.84,60.54 U3.6 84.3,61 R7.1
N02229: length 10
  BOTTOM w0.3: U3.8 83.59,50.38 83.13,50.84 R7.2 77.5,47.84 R8.1
N02304: length 8.5
  BOTTOM w0.3: U3.10 89.84,48.68 R8.2 88.48,45.68 88.48,44.52 R9.1
N05133: length 92.9
  BOTTOM w0.3: U4.9 128.28,94.65 125.71,97.22 60.22,97.22 U5.1
N05160: length 135.3
  BOTTOM w0.3: U4.7 124.57,74.67 122.72,74.67 122.03,73.98 122.03,71.47 123.17,70.33 123.17,69.18 117.2,63.21 111.43,63.21 111.43,63.21 110.43,63.21 108.19,60.96 107.39,60.96 107.34,61.02 105.66,61.02 104.48,59.84 104.48,58.16 104.54,58.11 104.54,55.97 104.5,55.93 104.5,53.23 95.98,44.71 93,44.71 90.62,42.33 80.88,42.33 77.88,45.33 77.02,45.33 76.33,46.02 76.33,75.94 61.1,91.17 59.25,91.17 U5.3
N05172: length 122.8
  BOTTOM w0.3: U4.6 123.2,71.08 123.72,70.56 123.72,68.95 117.43,62.65 111.2,62.65 111.2,62.66 110.66,62.66 108.42,60.41 107.16,60.41 107.11,60.46 105.89,60.46 105.04,59.61 105.04,58.39 105.89,57.54 105.97,57.54 106.42,57.09 106.92,57.09 107.92,56.09 107.92,55.86 96.21,44.15 93.23,44.15 90.86,41.78 80.64,41.78 77.64,44.78 77.22,44.78 76.53,45.47 76.09,45.47 75.78,45.79 75.78,61.25 75,62.03 75,68.5 65.21,78.29 64.79,78.29 64.42,77.92 61.65,77.92 61.1,78.47 60.14,78.47 59.59,77.92 54.92,77.92 U5.5
N05184: length 79.7
  BOTTOM w0.3: v1(81.12,66) 88.15,66 95.55,73.4 95.55,76.66 95.69,76.8 95,77.5 95,81 95.31,81.31 95.31,81.47 96.34,82.5 97,82.5 97.61,81.89 97.61,79.53 98,79.14 98,77.55 99.94,77.55 100.83,76.66 100.83,75.9 101.52,75.21 102.48,75.21 103.17,75.9 103.17,76.22 113.45,86.51 114.48,86.51 115.58,85.41 U4.14 ; U5.9 62.2,77.3 v1(73.5,66)
N05202: length 20.5
  BOTTOM w0.3: U7.10 35.88,85.24 36.03,85.39 39.5,85.39 40.52,86.41 51.95,86.41 U5.2
N05214: length 13.2
  BOTTOM w0.3: U7.7 43.86,82.38 U5.4
N05226: length 14
  BOTTOM w0.3: U7.2 45.76,77.3 U5.6
N05238: length 41.3
  BOTTOM w0.3: U7.15 31.66,70.82 31.66,69.29 32.79,68.15 33.64,68.15 34.79,67 34.79,65.92 36.27,64.44 38.45,64.44 40,66 40,66.22 40.05,66.27 40.05,66.96 49.02,75.93 53.48,75.93 54.65,74.76 U5.8
N05506: length 5.5
  BOTTOM w0.3: U6.6 14.84,84.91 16.11,86.17 U6.10
N05615: length 24.5
  BOTTOM w0.3: U7.11 32.21,83.87 32.21,85.72 33.1,86.61 33.86,86.61 34.55,87.3 34.55,88.26 33.86,88.95 24.56,88.95 20.52,84.91 U6.11
N05627: length 15.6
  BOTTOM w0.3: U7.9 27.28,87.78 23.14,83.64 U6.12
N05639: length 39.6
  BOTTOM w0.3: U7.1 39.5,68.5 39.5,66.5 38.29,65.29 36.21,65.29 35.35,66.15 35.35,67.23 33.87,68.71 33.02,68.71 32.21,69.52 32.21,70.48 32.9,71.17 33.66,71.17 34.55,72.06 34.55,75.56 33.66,76.45 29.55,76.45 23.64,82.36 U6.13
N05651: length 16.4
  BOTTOM w0.3: U6.14 22.41,81.09 28.42,75.08 U7.14
N05837: length 11.5
  BOTTOM w0.3: C2.1 56.83,10.5 56.3,9.97 46.68,9.97
N06039: length 79.8
  BOTTOM w0.3: U7.3 42.17,76.25 42.17,77.17 43.5,78.5 53.45,78.5 54.17,77.78 54.17,77.33 55.5,76 62,76 63.5,74.5 63.5,57.5 71.25,49.75 71.75,49.75 75.23,46.27 75.23,45.56 75.86,44.92 76.3,44.92 76.99,44.23 77.27,44.23 85.5,36 v1(86.5,36) ; v1(101.74,36) 101.74,33.43 102,33.17 U9.1
N06118: length 46.9
  BOTTOM w0.3: U8.13 129.88,38.88 130.71,38.06 130.71,35.71 127.85,32.84 107.57,32.84 105.92,34.5 105,34.5 102.5,37 100,37 98.96,35.96 98.96,34.04 U9.3
N06347: length 8.1
  BOTTOM w0.3: R18.1 116.38,36.88 C3.2 118.9,41.52 118.9,41.56 U8.9
N12761: length 10.6
  BOTTOM w0.3: Q1.1 51.5,23.5 50,25 R22.1
N12791: length 14.9
  BOTTOM w0.3: R22.2 49.96,38.62 U10.11 55.05,39.79 55.05,42.53 U10.9
N12870: length 22.9
  BOTTOM w0.3: U10.12 52.13,37.83 50.82,37.83 46.98,33.99 46.02,33.99 45.33,34.68 45.33,35.64 49.19,39.5 52.22,39.5 U10.10
N12949: length 36.9
  BOTTOM w0.3: 52.32,35.84 52.32,35.1 ; 52.33,35.84 52.33,35.09 ; 52.32,35.84 R21.2 48.28,33.44 45.79,33.44 37.05,42.17 33.25,42.17 U12.3 ; 52.33,35.09 U10.13
N13065: length 83.8
  BOTTOM w0.3: U9.4 92.66,33.72 89.37,33.72 88.13,32.48 88.13,30 89.48,28.65 102.12,28.65 115.08,15.69 115.47,15.69 116.74,14.42 116.74,13.61 116.53,13.4 116.1,13.4 115.89,13.61 113.39,13.61 108,19 108,19.5 103.17,24.33 103.17,24.86 102.48,25.55 101.95,25.55 100.58,26.92 88.13,26.92 86.76,25.55 U9.8
N13106: length 35.1
  BOTTOM w0.3: U13.9 119.38,25.95 115.59,29.74 v1(108,29.74) ; U9.10 101.5,14.72 101.5,14.3 101.8,14 107.7,14 108,14.3 v1(108,14.5)
N16220: length 37.6
  BOTTOM w0.3: U11.3 28.5,65.5 29.11,64.89 29.49,64.89 29.79,65.19 29.79,65.98 30.48,66.67 31.44,66.67 32.13,65.98 32.13,65.02 31.44,64.33 31.44,63.84 31.79,63.5 36.62,63.5 U10.8
N16266: length 22.6
  BOTTOM w0.3: U11.10 20.64,55.5 27.1,55.5 31.5,51.1 31.5,49 U12.13
N16278: length 40.7
  BOTTOM w0.3: U11.5 22.38,66.46 22.38,66.88 23.34,67.84 23.34,68.65 23.21,68.79 23.21,69.21 23.71,69.71 24.29,69.71 24.79,69.21 25.29,69.21 27.25,67.25 27.25,65.02 27.94,64.33 30.17,64.33 36.34,58.16 36.84,58.16 40.89,54.11 40.89,50.89 39.24,49.24 35.45,49.24 U12.14
N16290: length 16.7
  BOTTOM w0.3: U12.15 29.53,56.05 22.63,56.05 U11.11
N16648: length 11.8
  BOTTOM w0.3: U10.3 62.92,34.66 R19.2 69.34,31.32 70.18,31.32 C5.1
N16662: length 14.4
  BOTTOM w0.3: C5.2 66.94,42.18 66.16,42.18 R20.2 64.17,43 63.47,43.7 U10.6 U10.5
N16697: length 19
  BOTTOM w0.3: C4.1 74.5,24.5 R19.1 61.5,29 U10.1
N16721: length 78.8
  BOTTOM w0.3: C4.2 73.45,33.17 73.45,36.95 ; 73.45,36.95 75.5,39 R20.1 ; 73.45,36.95 63.17,36.95 U10.4 59.7,40.42 59.7,41.15 59.47,41.39 58.73,41.39 58.62,41.5 56.5,41.5 56.06,41.94 56.06,44.06 55.05,45.07 37.43,45.07 35.25,47.25 34.14,47.25 33.45,47.94 33.45,48.9 34.34,49.79 35.1,49.79 35.79,50.48 35.79,51.44 35.1,52.13 34.34,52.13 32.13,54.34 32.13,58.36 31.44,59.05 29.59,59.05 U11.14
